# Altium PCB power_board_v0.PcbDoc
Units mm, origin at the board's own origin, x right, y up, seen from the top; angles counter-clockwise.
Board outline 50 x 50 mm, 4 copper layers (TOP, GND, PWR, BOTTOM), stack 0.603 mm thick; 71 components, 23 nets, 157 pads, 267 vias.
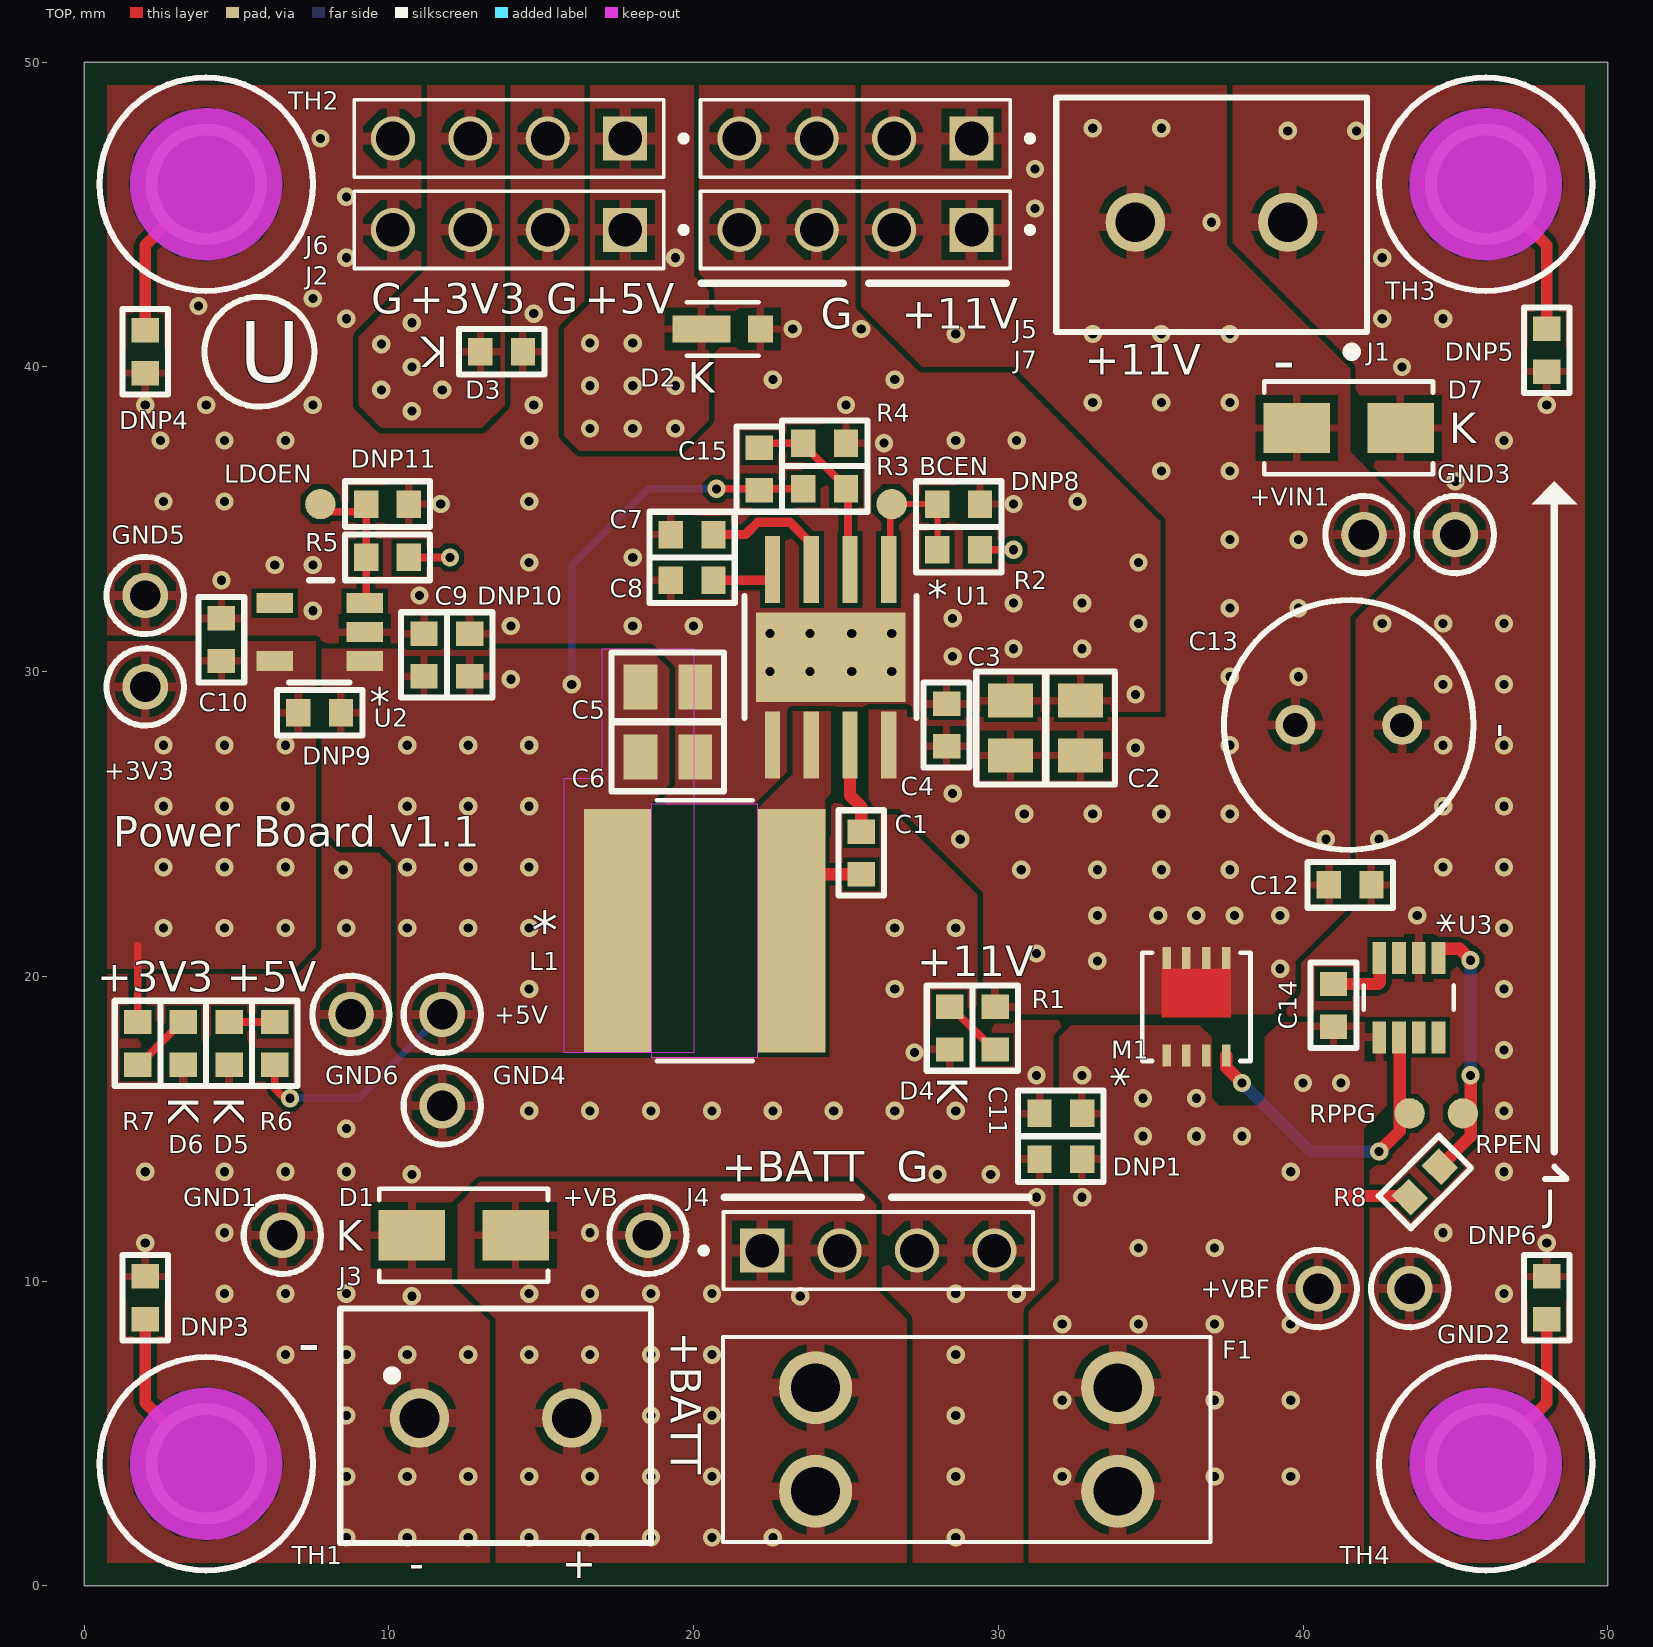
[diagram p0: TOP view]
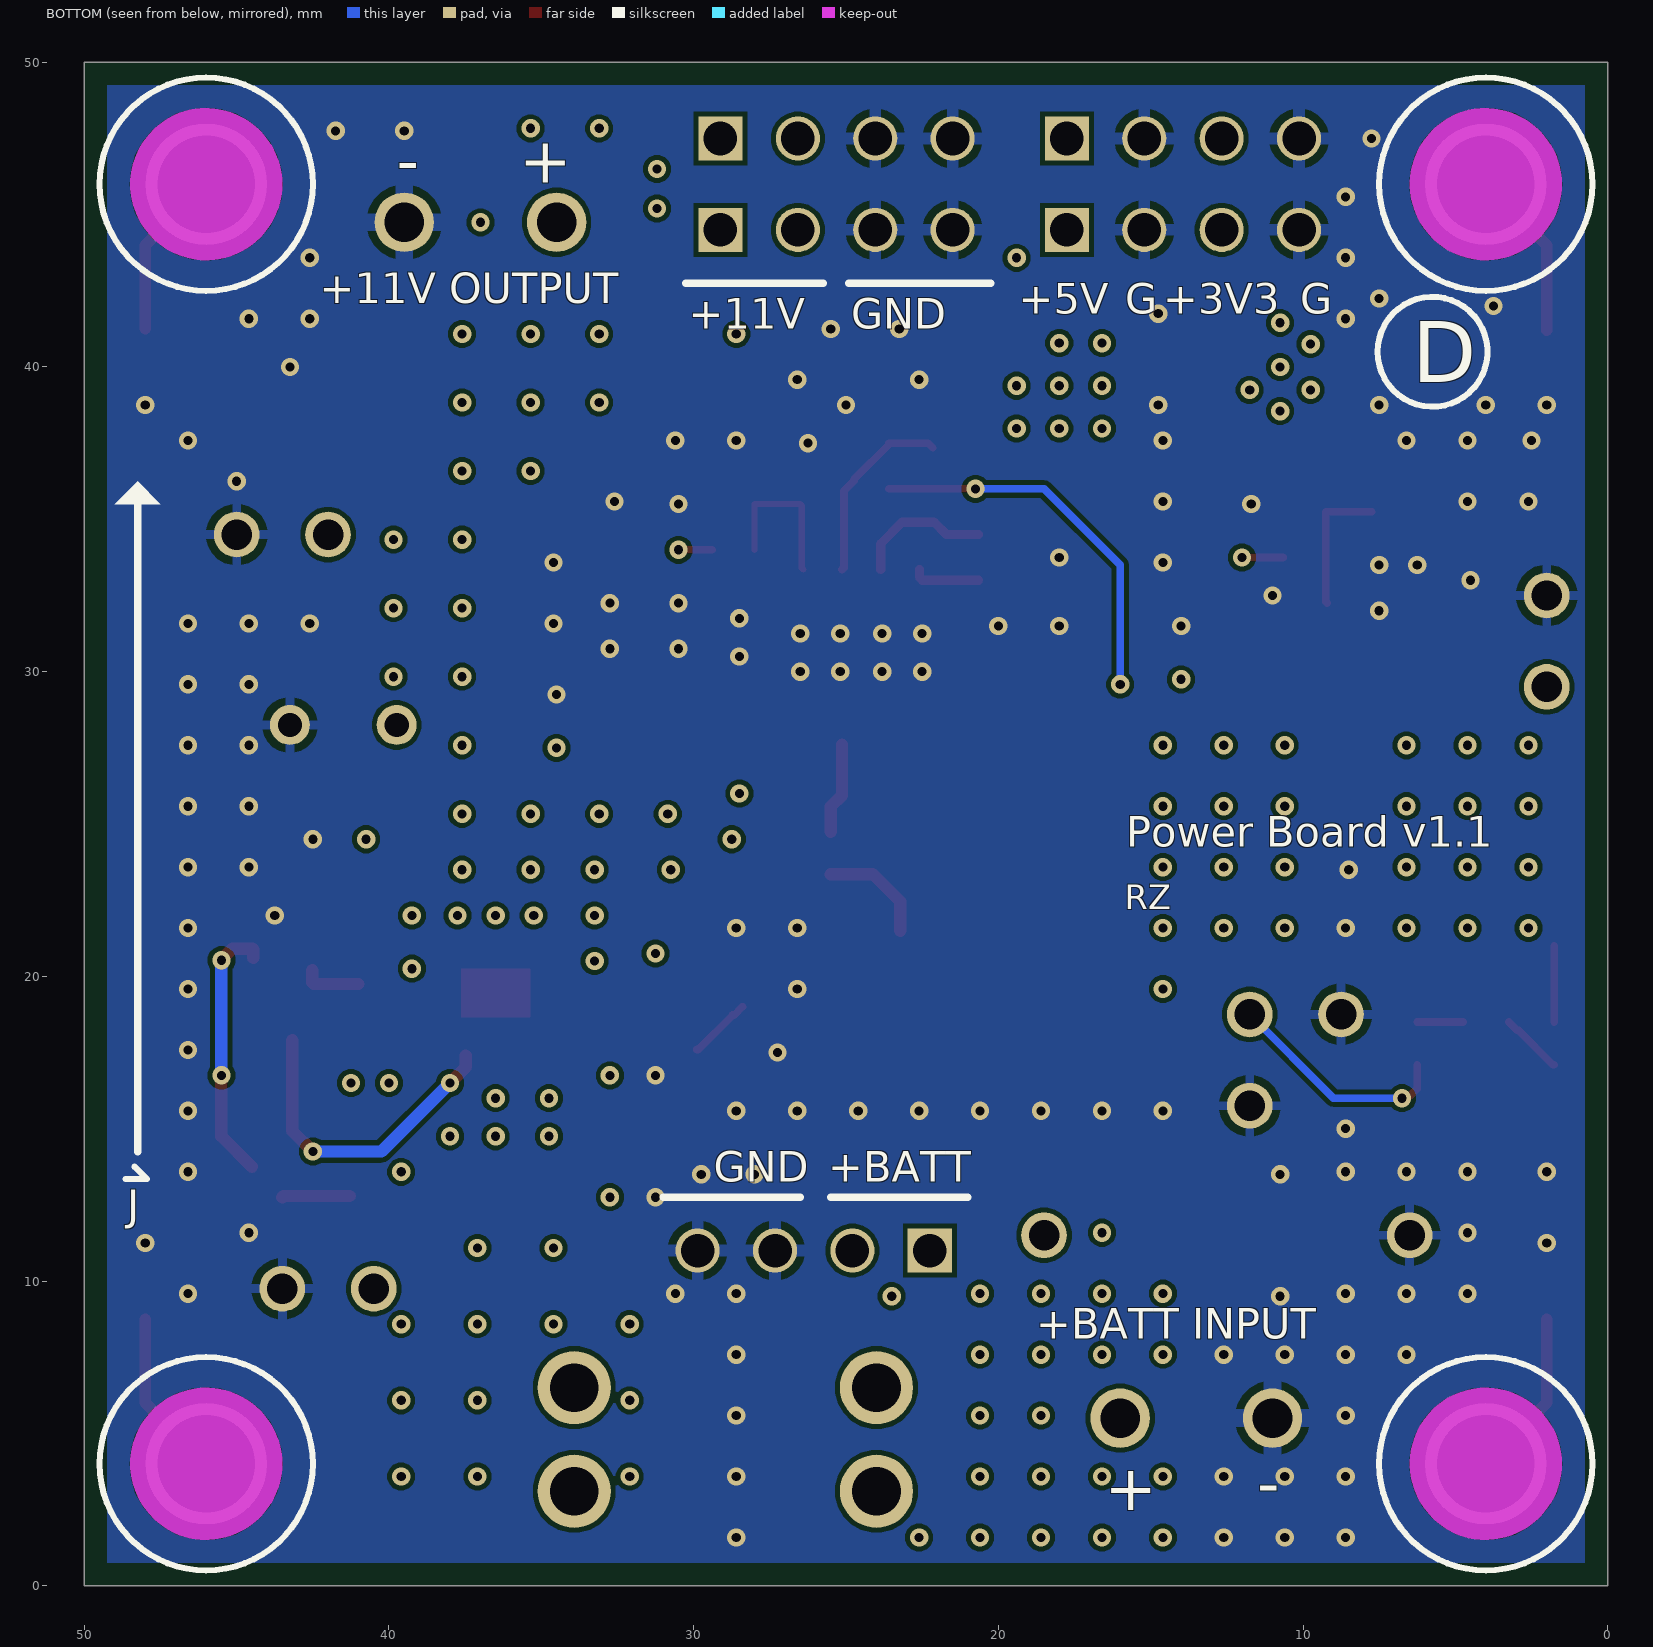
[diagram p1: BOTTOM view, seen from below]
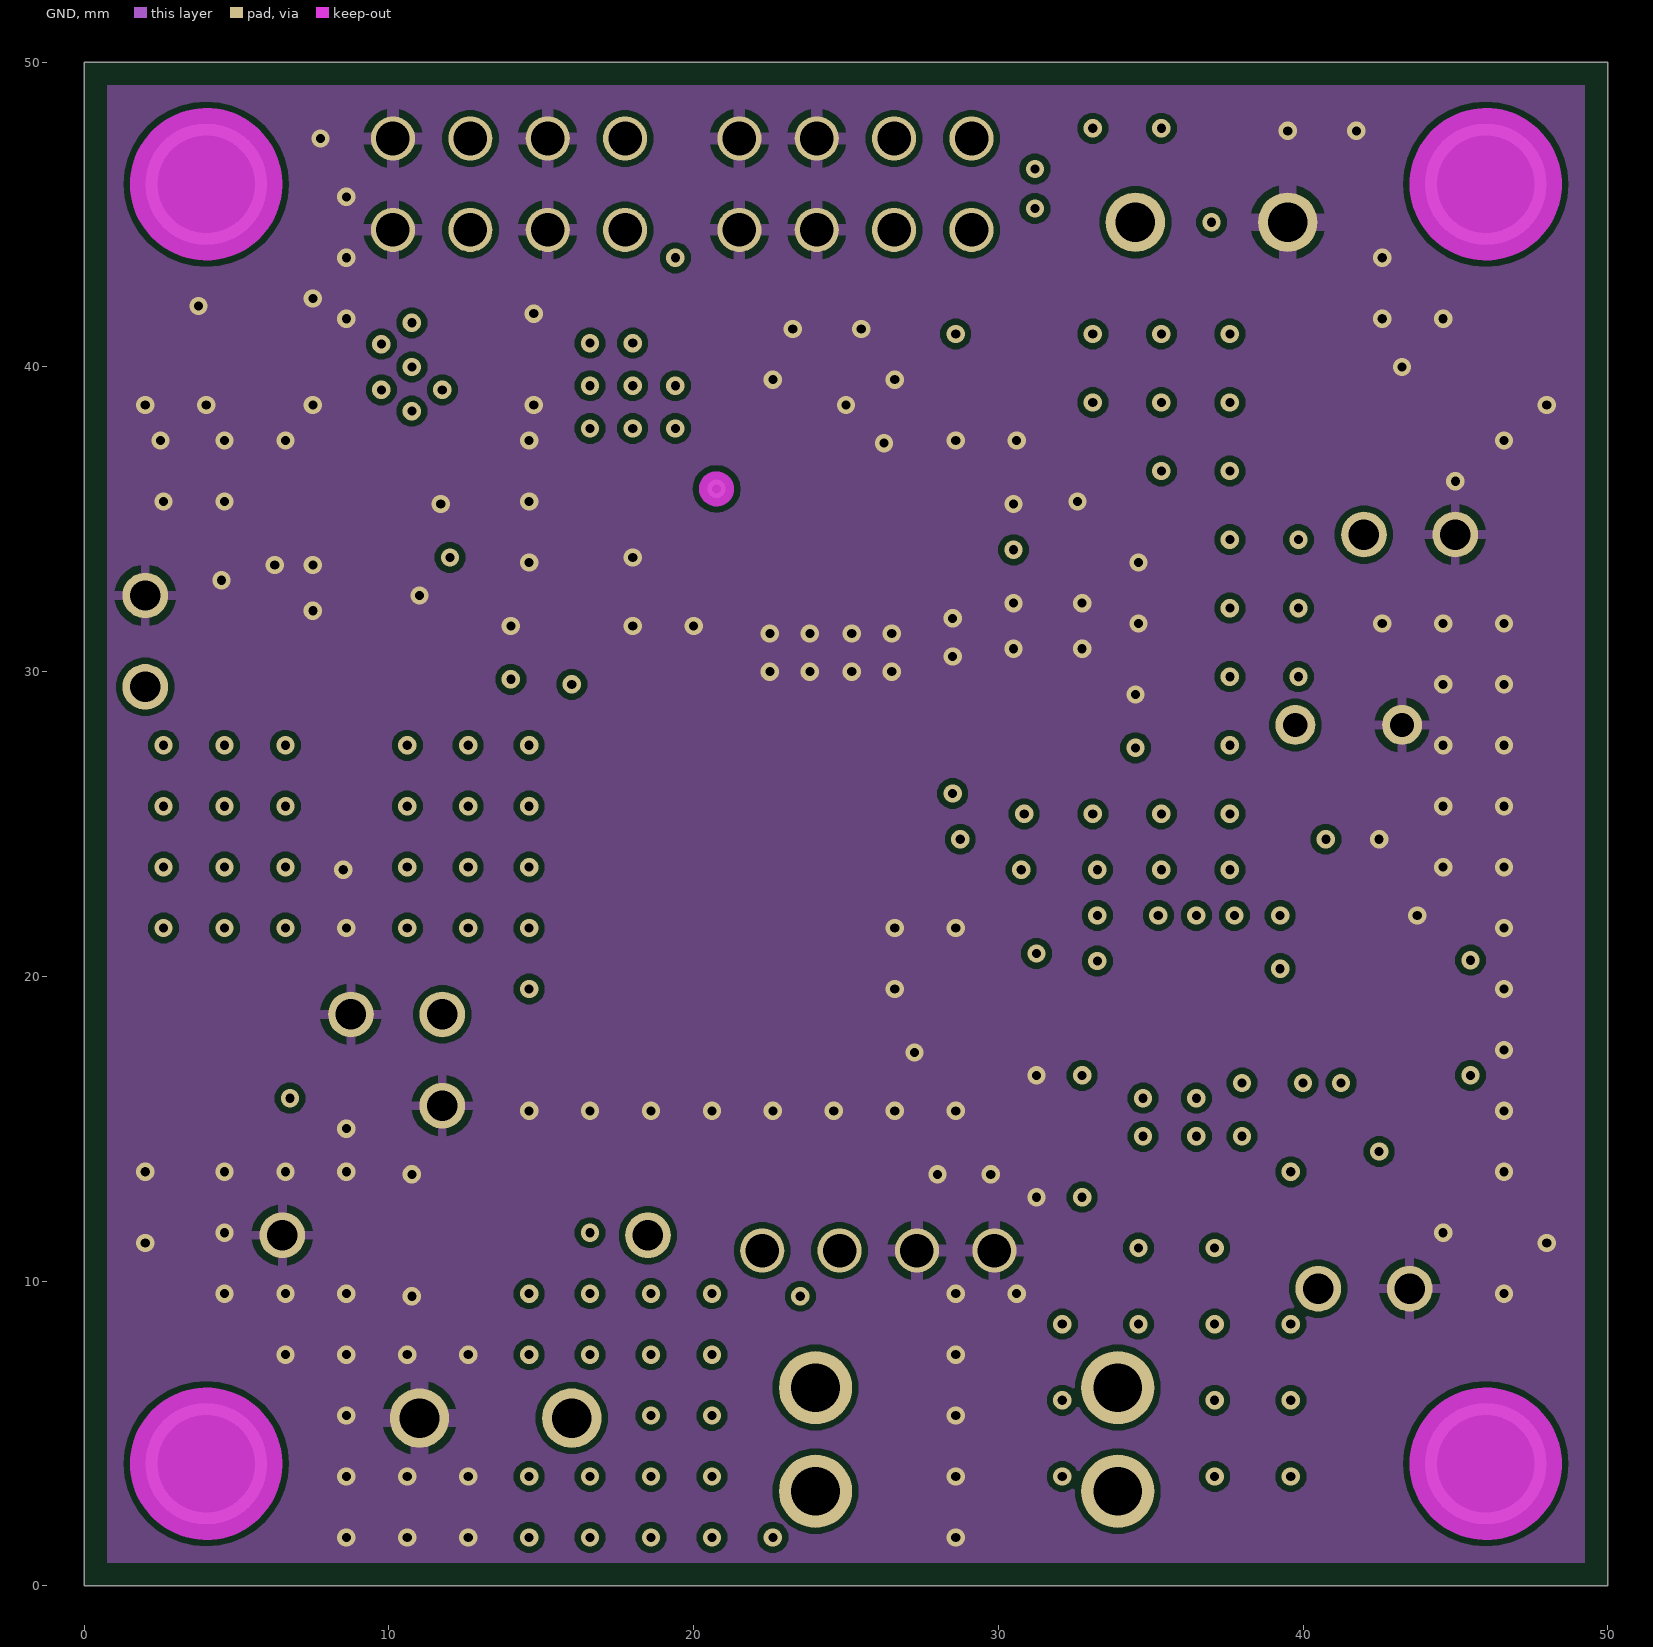
[diagram p2: GND]
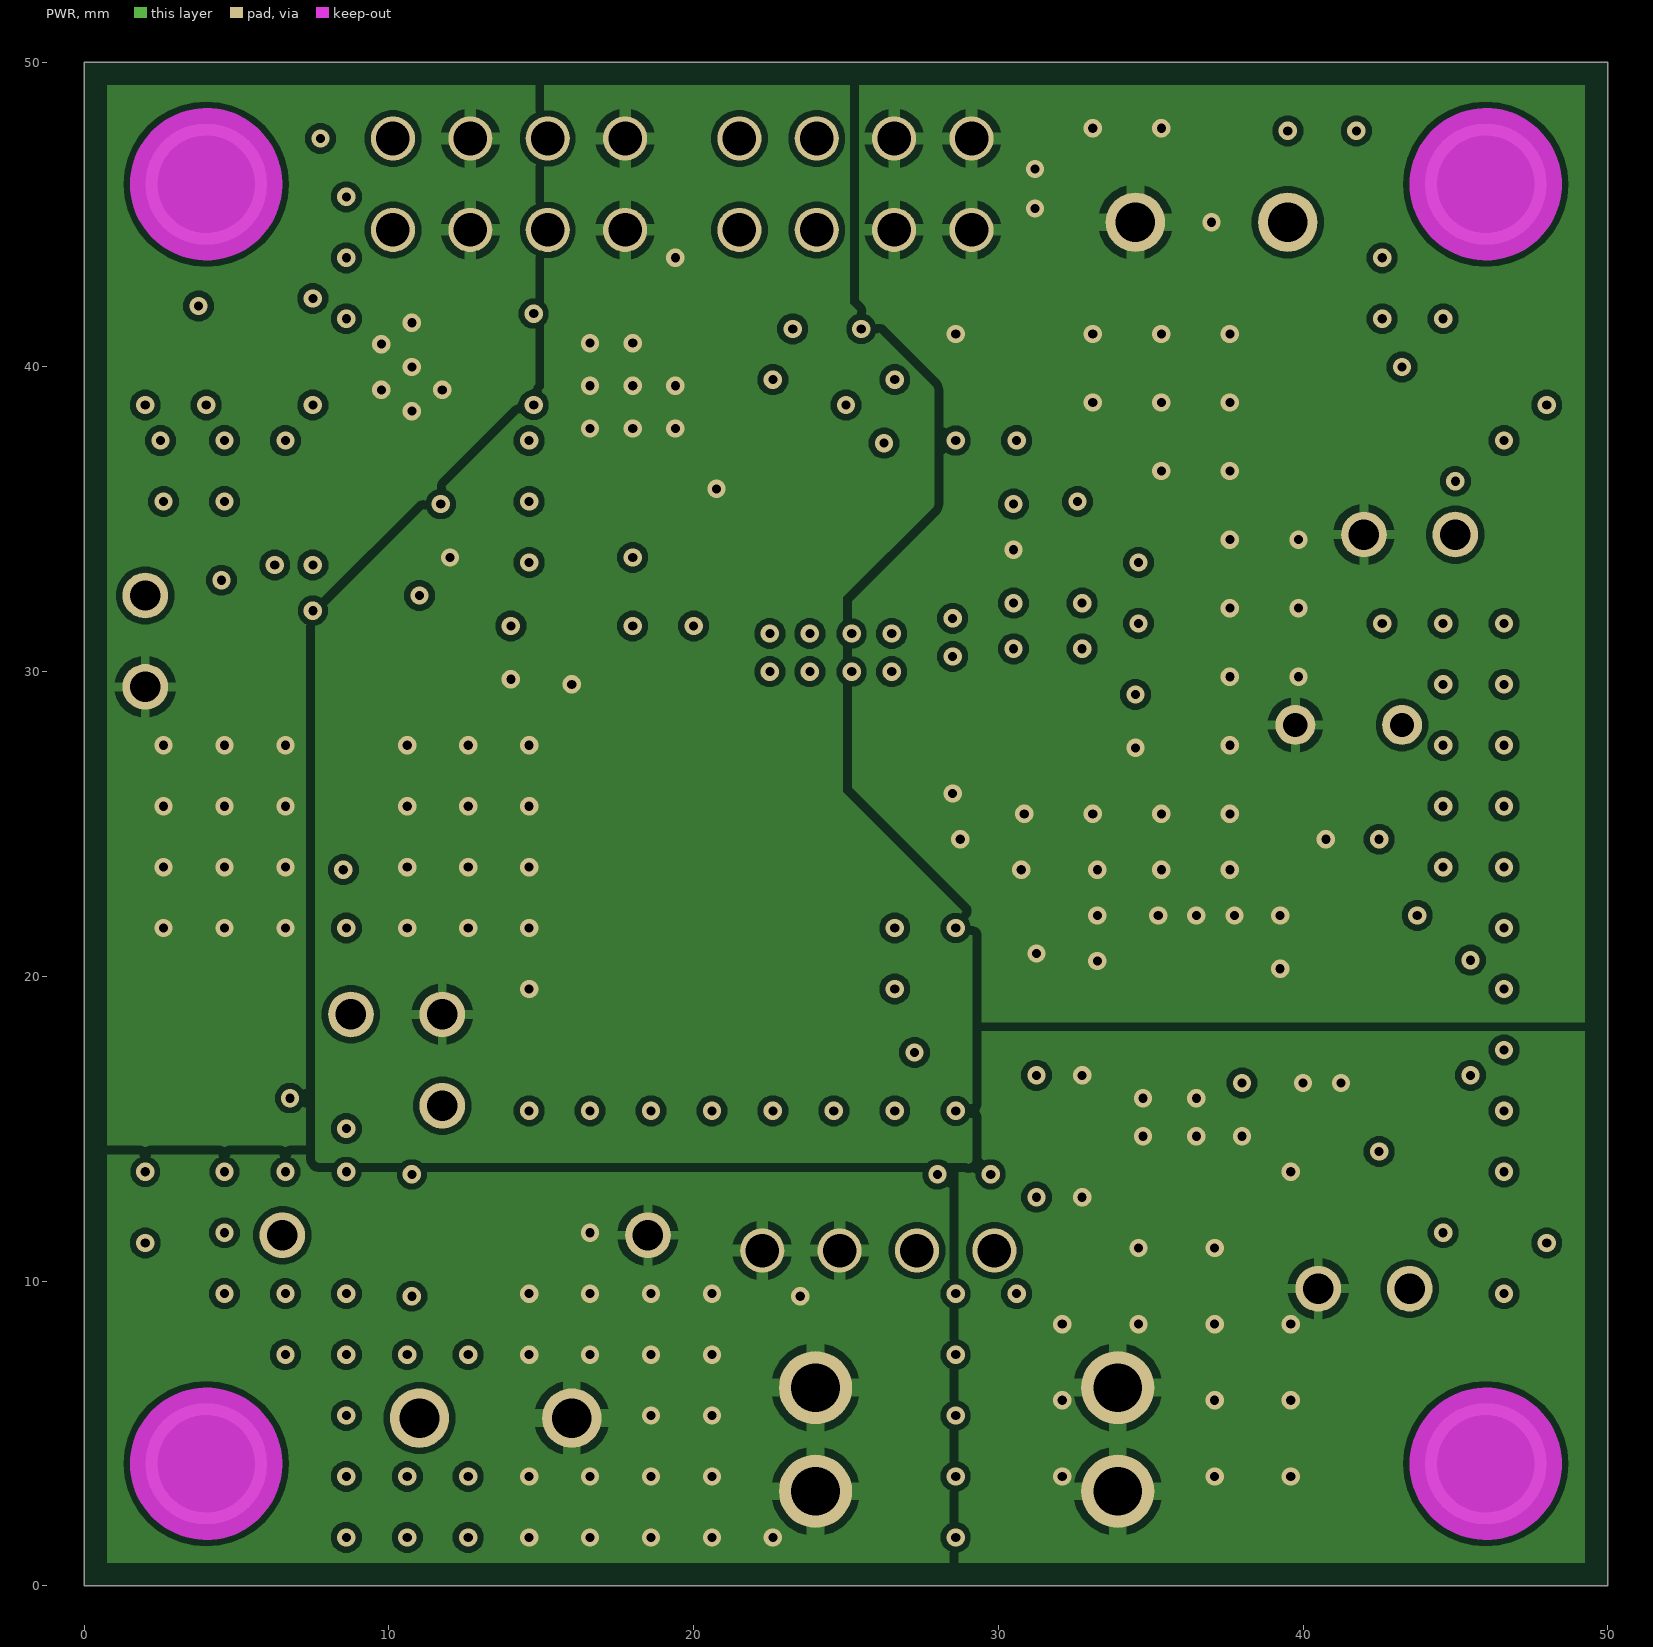
[diagram p3: PWR]
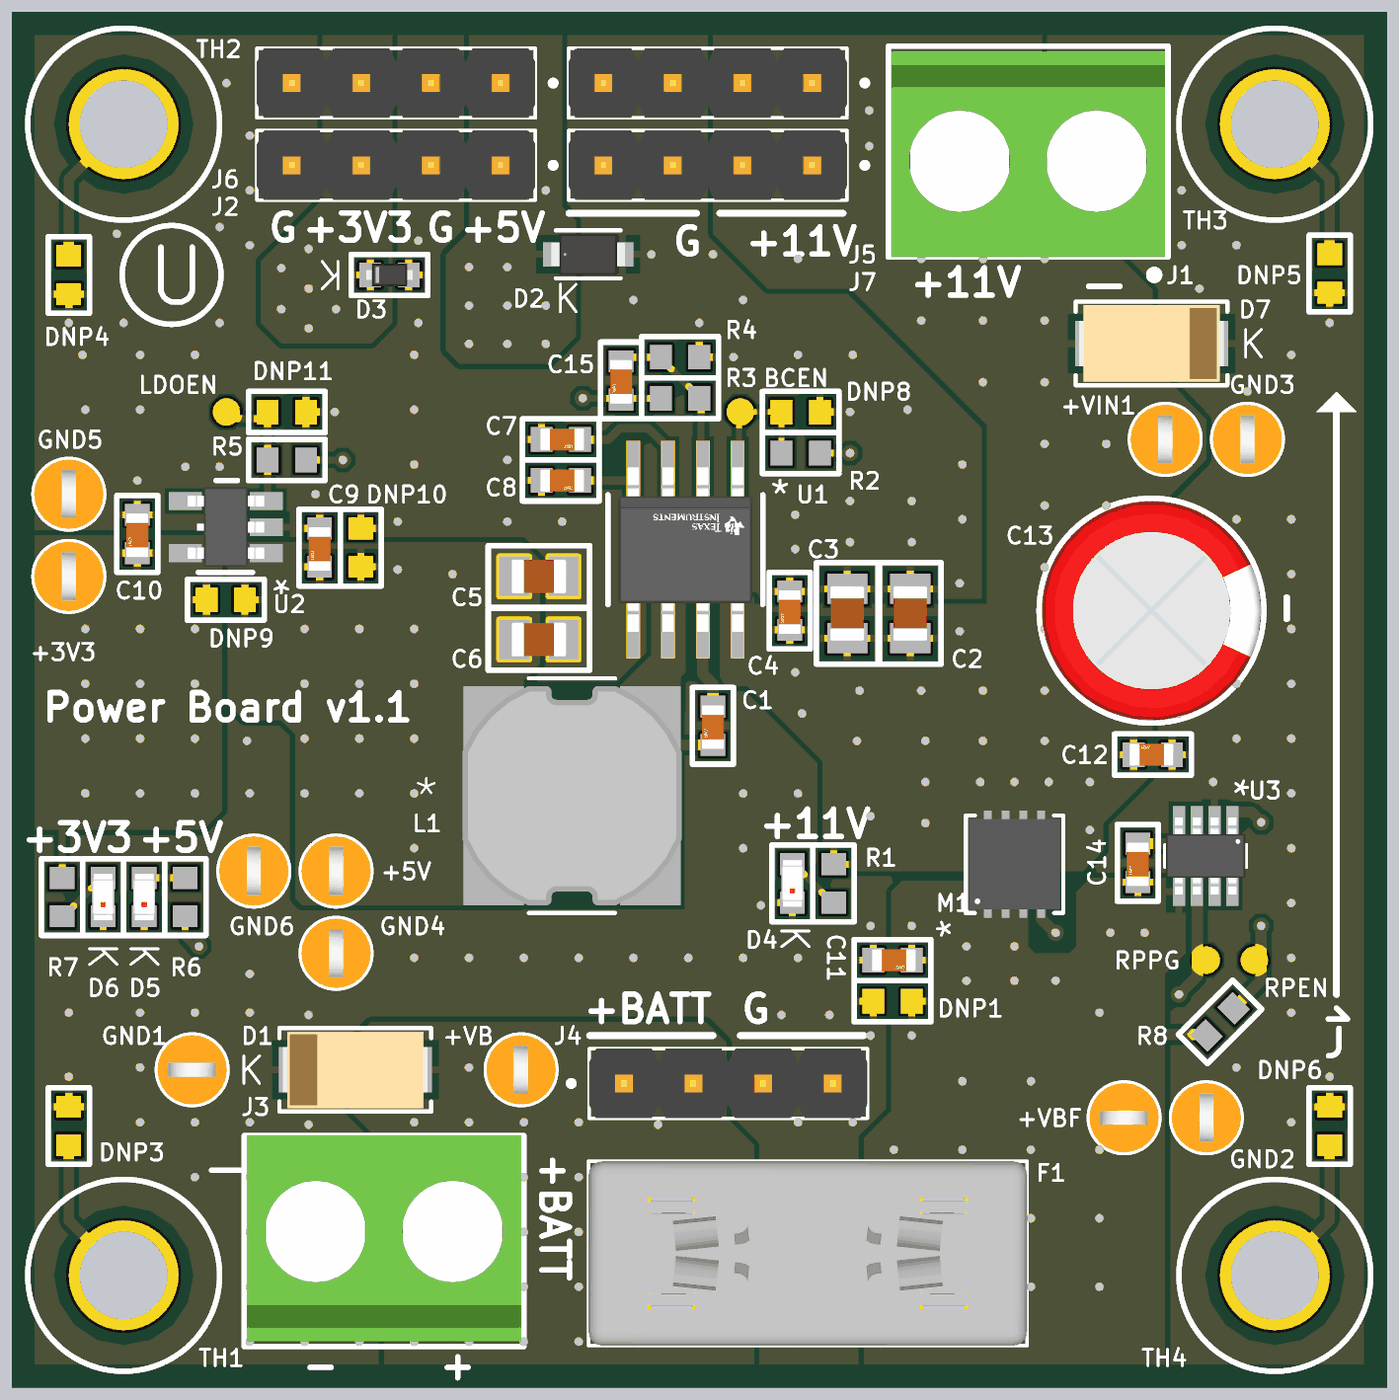
[diagram p4: 3D render of the assembled board from above, using the file's embedded part models]

## Layer stack, top to bottom
Top Solder: solder mask 0.0102, Solder Resist, Dk 3.5
TOP: signal copper 0.0356
Dielectric 2: prepreg 0.0711, PP-006, Dk 4.1
GND: signal copper 0.035
Dielectric 1: dielectric 0.32, FR-4, Dk 4.8
PWR: signal copper 0.035
Dielectric 3: prepreg 0.0711, PP-006, Dk 4.1
BOTTOM: signal copper 0.0356
Bottom Solder: solder mask 0.0102, Solder Resist, Dk 3.5

## Board outline
0,0 50,0 50,50 0,50

## Design rules (kind name [scope] priority, off if disabled: settings)
AcuteAngle [All] p1: minimum=6.00000000000000E+0001 checktracksonly=TRUE
BoardOutlineClearance "Clearance JLCPCB Board Outline" [All] p1: gap=0.3 ignorepadtopadclearanceinfootprint=FALSE except(0.2: Text-OutlineEdge; 0.743: Poly-OutlineEdge)
Clearance "Power Plane Clearance" [OnLayer('GND') OR OnLayer('PWR')] p1: gap=0.2 ignorepadtopadclearanceinfootprint=FALSE except(0.3: Fill-Fill Fill-Poly Fill-Region Poly-Poly Poly-Region Region-Region)
Clearance "keepout clearance" [IsKeepOut] p2: gap=0 ignorepadtopadclearanceinfootprint=TRUE
Clearance Clearance_1 [All] p3: gap=0.152 ignorepadtopadclearanceinfootprint=TRUE except(0.175: Fill-Fill Fill-Poly Fill-Region Poly-Poly Poly-Region Region-Region)
Clearance "Via Stitching Default Constraint" [IsStitchingVia vs (IsVia And (Not IsStitchingVia)) Or IsPad] p4: gap=0.2 ignorepadtopadclearanceinfootprint=FALSE
ComponentClearance [All] p1: gap=0 collisioncheckmode=3 verticalgap=0.254 showdistances=FALSE
DiffPairsRouting [All] p1: maxlimit=0.254 minlimit=0.152 mostfreqgap=0.254 toplayer_maxgap=0.152 toplayer_prefgap=0.152 toplayer_minwidth=0.089 toplayer_maxwidth=0.381 toplayer_prefwidth=0.122 midlayer1_mingap=0.254 midlayer1_minwidth=0.381 midlayer1_maxwidth=0.381 midlayer1_prefwidth=0.381 midlayer2_mingap=0.254 midlayer2_minwidth=0.381 midlayer2_maxwidth=0.381 midlayer2_prefwidth=0.381 bottomlayer_maxgap=0.152 bottomlayer_prefgap=0.152 bottomlayer_minwidth=0.089 bottomlayer_maxwidth=0.381 bottomlayer_prefwidth=0.122 maxuncoupledlength=12.7
HoleSize [All] p1: absolutevalues=TRUE maxlimit=6.3 minlimit=0.025 maxpercent=80.000 minpercent=20.000
HoleToHoleClearance [All] p1: gap=0.3 allowstackedmicrovias=FALSE
MinimumAnnularRing [All] p1: minimumring=0.15
MinimumSolderMaskSliver [All] p1: minsoldermaskwidth=0.038
PlaneConnect [All] p1: planeconnectstyle=Direct reliefexpansion=0.508 reliefentries=4 reliefconductorwidth=0.254 reliefairgap=0.254
PolygonConnect "+BATT CON LARGE THERMAL" [InComponent('j1') OR InComponent('F1') OR InComponent('J3') vs InNet('+VIN') OR InNet('GND') OR InNet('+VBATT') OR InNet('+VBATT_F')] p1: thpad.connectstyle=Relief thpad.reliefconductorwidth=0.6 thpad.reliefentries=4 thpad.polygonreliefangle="90 Angle" thpad.airgapwidth=0.254 smdpad.connectstyle=Relief smdpad.reliefconductorwidth=0.254 smdpad.reliefentries=4 smdpad.polygonreliefangle="90 Angle" smdpad.airgapwidth=0.254 via.connectstyle=Relief via.reliefconductorwidth=0.254 via.reliefentries=4 via.polygonreliefangle="90 Angle" via.airgapwidth=0.254
PolygonConnect "+HEADER THERMALS" [InComponent('j2') OR InComponent('J4') OR InComponent('J5') OR InComponent('J6') OR InComponent('J7') vs InNet('+VIN') OR InNet('GND') OR InNet('+VBATT') OR InNet('+VBATT_F') OR  InNet('+3V3') OR InNet('+5V')] p2: thpad.connectstyle=Relief thpad.reliefconductorwidth=0.4 thpad.reliefentries=4 thpad.polygonreliefangle="90 Angle" thpad.airgapwidth=0.254 smdpad.connectstyle=Relief smdpad.reliefconductorwidth=0.254 smdpad.reliefentries=4 smdpad.polygonreliefangle="90 Angle" smdpad.airgapwidth=0.254 via.connectstyle=Relief via.reliefconductorwidth=0.254 via.reliefentries=4 via.polygonreliefangle="90 Angle" via.airgapwidth=0.254
PolygonConnect "No Thermal Relief +5V" [InComponent('L1') OR InComponent('C5') OR InComponent('C6') OR InComponent('U2') vs InNet('+5V')] p3: thpad.connectstyle=Relief thpad.reliefconductorwidth=0.254 thpad.reliefentries=4 thpad.polygonreliefangle="90 Angle" thpad.airgapwidth=0.254 smdpad.connectstyle=Direct smdpad.reliefconductorwidth=0.254 smdpad.reliefentries=4 smdpad.polygonreliefangle="90 Angle" smdpad.airgapwidth=0.254 via.connectstyle=Direct via.reliefconductorwidth=0.254 via.reliefentries=4 via.polygonreliefangle="90 Angle" via.airgapwidth=0.254
PolygonConnect "No Thermal Relief GND" [InComponent('U1') OR InComponent('C5') OR InComponent('C6') vs InNet('GND')] p4: thpad.connectstyle=Relief thpad.reliefconductorwidth=0.254 thpad.reliefentries=4 thpad.polygonreliefangle="90 Angle" thpad.airgapwidth=0.254 smdpad.connectstyle=Direct smdpad.reliefconductorwidth=0.254 smdpad.reliefentries=4 smdpad.polygonreliefangle="90 Angle" smdpad.airgapwidth=0.254 via.connectstyle=Direct via.reliefconductorwidth=0.254 via.reliefentries=4 via.polygonreliefangle="90 Angle" via.airgapwidth=0.254
PolygonConnect "No Thermal Relief BATT GENERAL" [InComponent('M1') OR InComponent('U1') vs InNet('+VBATT_F') OR InNet('+VIN')] p5: thpad.connectstyle=Relief thpad.reliefconductorwidth=0.254 thpad.reliefentries=4 thpad.polygonreliefangle="90 Angle" thpad.airgapwidth=0.254 smdpad.connectstyle=Direct smdpad.reliefconductorwidth=0.254 smdpad.reliefentries=4 smdpad.polygonreliefangle="90 Angle" smdpad.airgapwidth=0.254 via.connectstyle=Direct via.reliefconductorwidth=0.254 via.reliefentries=4 via.polygonreliefangle="90 Angle" via.airgapwidth=0.254
PolygonConnect "No Thermal Relief +3V3" [InComponent('U2') vs InNet('+3V3')] p6: thpad.connectstyle=Relief thpad.reliefconductorwidth=0.254 thpad.reliefentries=4 thpad.polygonreliefangle="90 Angle" thpad.airgapwidth=0.254 smdpad.connectstyle=Direct smdpad.reliefconductorwidth=0.254 smdpad.reliefentries=4 smdpad.polygonreliefangle="90 Angle" smdpad.airgapwidth=0.254 via.connectstyle=Direct via.reliefconductorwidth=0.254 via.reliefentries=4 via.polygonreliefangle="90 Angle" via.airgapwidth=0.254
PolygonConnect "No Thermal Relief SW Node" [InComponent('L1') OR InComponent('U1') vs InNet('BC_SWN')] p7: thpad.connectstyle=Relief thpad.reliefconductorwidth=0.254 thpad.reliefentries=4 thpad.polygonreliefangle="90 Angle" thpad.airgapwidth=0.254 smdpad.connectstyle=Direct smdpad.reliefconductorwidth=0.254 smdpad.reliefentries=4 smdpad.polygonreliefangle="90 Angle" smdpad.airgapwidth=0.254 via.connectstyle=Direct via.reliefconductorwidth=0.254 via.reliefentries=4 via.polygonreliefangle="90 Angle" via.airgapwidth=0.254
PolygonConnect "GENERAL DEFAULT" [All] p8: thpad.connectstyle=Relief thpad.reliefconductorwidth=0.305 thpad.reliefentries=4 thpad.polygonreliefangle="90 Angle" thpad.airgapwidth=0.254 smdpad.connectstyle=Relief smdpad.reliefconductorwidth=0.254 smdpad.reliefentries=4 smdpad.polygonreliefangle="90 Angle" smdpad.airgapwidth=0.254 via.connectstyle=Direct via.reliefconductorwidth=0.254 via.reliefentries=4 via.polygonreliefangle="90 Angle" via.airgapwidth=0.254
RoomDefinition U_ldo_3v3 [InComponentClass('U_ldo_3v3')] p1: confinementstyle=ConfineIn formatcopy=TRUE lockcomponents=FALSE outline 16,38 0.5,38 0.5,26 16,26
RoomDefinition U_buck_converter [InComponentClass('U_buck_converter')] p2: confinementstyle=ConfineIn formatcopy=TRUE lockcomponents=FALSE outline 10.25,39.25 10.25,14.25 35.75,14.25 35.75,39.25
RoomDefinition U_reverse_polarity_protection [InComponentClass('U_reverse_polarity_protection')] p3: confinementstyle=ConfineIn formatcopy=TRUE lockcomponents=FALSE outline 49,10.25 49,33.25 29.75,33.25 29.75,10.25
RoutingVias [All] p1: holewidth=0.25 width=0.5 viastyle="Through Hole" minholewidth=0.2 minwidth=0.4 maxholewidth=0.4 maxwidth=1
SilkToSilkClearance [All] p1 off: silktosilkclearance=0
SilkToSolderMaskClearance [IsPad] p1: minsilkscreentomaskgap=0.15 clearancetoexposedcopper=TRUE
SolderMaskExpansion SolderMaskExpansion_PAD [InPadClass('All Pads')] p1: expansion=0.051 istentingtop=FALSE
SolderMaskExpansion SolderMaskExpansion_VIA [IsVia] p2: expansion=0.102 istentingtop=TRUE
SolderMaskExpansion [All] p3: expansion=0.102 istentingtop=FALSE
SupplyNets "Schematic Supply Nets_18" [InNet('+3V3')] p1: voltage=0.000
SupplyNets "Schematic Supply Nets_16" [InNet('+VBATT_F')] p2: voltage=0.000
SupplyNets "Schematic Supply Nets_15" [InNet('+VIN')] p3: voltage=0.000
SupplyNets "Schematic Supply Nets_7" [InNet('+VBATT')] p4: voltage=0.000
SupplyNets "Schematic Supply Nets_2" [InNet('+5V')] p5: voltage=0.000
SupplyNets "Schematic Supply Nets_8" [InNet('GND')] p6: voltage=0.000
Width [All] p1: maxlimit=5 minlimit=0.1 preferedwidth=0.254
22 further rules are at their usual default settings.

## Classes and differential pairs
component class U_ldo_3v3: C9 C10 DNP9 DNP10 DNP11 LDOEN R5 U2
component class U_buck_converter: BCEN C1 C2 C3 C4 C5 C6 C7 C8 C15 DNP8 L1 R2 R3 R4 U1
component class U_reverse_polarity_protection: C11 C12 C13 C14 DNP1 M1 R8 RPEN RPPG U3
component class top_level: +3V3 +5V +VB +VBF +VIN1 D1 D2 D3 D4 D5 D6 D7 DNP3 DNP4 DNP5 DNP6 F1 GND1 GND2 GND3 GND4 GND5 GND6 J1 J2 J3 J4 J5 J6 J7 R1 R6 R7 TH1 TH2 TH3 TH4

## Components (designator, comment, footprint, x,y, rotation, side; value= is the part's Value field where it differs from the comment)
+3V3 "TP - 5008 (Compact)" "5008 - Keystone Compact Footprint" 2,29.5 r90 top
+5V "TP - 5008 (Compact)" "5008 - Keystone Compact Footprint" 11.75,18.75 r270 top
+VB "TP - 5008 (Compact)" "5008 - Keystone Compact Footprint" 18.5,11.5 r90 top
+VBF "TP - 5008 (Compact)" "5008 - Keystone Compact Footprint" 40.5,9.75 r180 top
+VIN1 "TP - 5008 (Compact)" "5008 - Keystone Compact Footprint" 42,34.5 r90 top
BCEN "TP - SMD Pad Testpoint-Symbol-1" "TP - SMD Pad Testpoint" 26.5,35.5 r270 top
C1 "C - CAP CER 100nF 100V 10% 0603" CAP_0603 25.5,24 r270 top value=100nF
C2 "GRM21BR61E106KA73L" "CAP 0805" 32.675,28.175 r270 top value=10uF
C3 "GRM21BR61E106KA73L" "CAP 0805" 30.375,28.175 r270 top value=10uF
C4 "C - CAP CER 100nF 100V 10% 0603" CAP_0603 28.3,28.2 r270 top value=100nF
C5 "GRM21BR61E226ME44L" "CAP 0805" 19.175,29.525 r180 top value=22uF
C6 "GRM21BR61E226ME44L" "CAP 0805" 19.175,27.225 r180 top value=22uF
C7 "CAP CER 220nF 50V 10% 0603" CAP_0603 20,34.5 r0 top value=1uF
C8 "C - CAP CER 10nF 100V 10% 0603" CAP_0603 20,33 r0 top value=10nF
C9 "CAP CER 220nF 50V 10% 0603" CAP_0603 11.15,30.5 r270 top value=1uF
C10 "CAP CER 220nF 50V 10% 0603" CAP_0603 4.5,31 r270 top value=1uF
C11 "C - CAP CER 100nF 100V 10% 0603" CAP_0603 32.1,15.5 r0 top value=100nF
C12 "C - CAP CER 100nF 100V 10% 0603" CAP_0603 41.5,23 r180 top value=100nF
C13 "860020574012" "C - 860020574012" 41.5,28.25 r0 top value=220uF
C14 "C - CAP CER 100nF 100V 10% 0603" CAP_0603 41,19 r270 top value=100nF
C15 "CAP CER 220nF 50V 10% 0603" CAP_0603 22.15,36.6 r270 top value=10pF
D1 "D - SMAJ15CA" "D - SMAJ15CA" 12.452,11.5 r0 top
D2 "D - CUHZ5V6,H3F" "D - CUHZ5V6,H3F" 20.25,41.25 r0 top
D3 "D - ESD321DYAR" "D - ESD321DYAR" 13.7,40.5 r180 top
D4 "D - LTST-C193KRKT-5A" "LED 0603" 28.4,18.3 r270 top
D5 "D - LTST-C193KRKT-5A" "LED 0603" 4.75,17.8 r270 top
D6 "D - LTST-C193KRKT-5A" "LED 0603" 3.25,17.8 r270 top
D7 "D - SMAJ15CA" "D - SMAJ15CA" 41.5,38 r180 top
DNP1 "DNP - DNP PAD 0603" "DNP 0603" 32.05,14 r0 top
DNP3 "DNP - DNP PAD 0603" "DNP 0603" 2,9.45 r90 top
DNP4 "DNP - DNP PAD 0603" "DNP 0603" 2,40.5 r270 top
DNP5 "DNP - DNP PAD 0603" "DNP 0603" 48,40.55 r270 top
DNP6 "DNP - DNP PAD 0603" "DNP 0603" 48,9.45 r90 top
DNP8 "DNP - DNP PAD 0603" "DNP 0603" 28.7,35.5 r180 top
DNP9 "DNP - DNP PAD 0603" "DNP 0603" 7.725,28.65 r180 top
DNP10 "DNP - DNP PAD 0603" "DNP 0603" 12.65,30.55 r270 top
DNP11 "DNP - DNP PAD 0603" "DNP 0603" 9.95,35.5 r180 top
F1 "F -3568" "F - 3568" 28.96,4.8 r0 top
GND1 "TP - 5008 (Compact)" "5008 - Keystone Compact Footprint" 6.5,11.5 r0 top
GND2 "TP - 5008 (Compact)" "5008 - Keystone Compact Footprint" 43.5,9.75 r270 top
GND3 "TP - 5008 (Compact)" "5008 - Keystone Compact Footprint" 45,34.5 r90 top
GND4 "TP - 5008 (Compact)" "5008 - Keystone Compact Footprint" 11.75,15.75 r90 top
GND5 "TP - 5008 (Compact)" "5008 - Keystone Compact Footprint" 2,32.5 r270 top
GND6 "TP - 5008 (Compact)" "5008 - Keystone Compact Footprint" 8.75,18.75 r90 top
J1 "J - 691137710002" "J - 691137710002" 37,44.75 r180 top
J2 "Copy of SMTC-TSW-106-07-X-D_1" "J - 61300411121" 13.94,44.5 r180 top
J3 "J - 691137710002" "J - 691137710002" 13.5,5.5 r0 top
J4 "Copy of SMTC-TSW-106-07-X-D_1" "J - 61300411121" 26.06,11 r0 top
J5 "Copy of SMTC-TSW-106-07-X-D_1" "J - 61300411121" 25.31,47.5 r180 top
J6 "Copy of SMTC-TSW-106-07-X-D_1" "J - 61300411121" 13.94,47.5 r180 top
J7 "Copy of SMTC-TSW-106-07-X-D_1" "J - 61300411121" 25.31,44.5 r180 top
L1 "SRN8040-3R3Y" "L - SRN8040-3R3Y" 20.358,21.5 r0 top locked value=3.3uH
LDOEN "TP - SMD Pad Testpoint-Symbol-1" "TP - SMD Pad Testpoint" 7.75,35.5 r90 top
M1 "M - DMT6007LFG-7" "M - DMT6007LFG-7" 36.5,19 r90 top
R1 "ERJ-PB3B1001V" "RES 0603" 29.9,18.3 r90 top value=1k
R2 "R - RES 10kR 0.1W 1% 0603" "RES 0603" 28.7,34 r0 top value=10k
R3 "RC0603FR-07121KL" "RES 0603" 24.3,36 r180 top value=121k
R4 "ERJ-3EKF2212V" "RES 0603" 24.3,37.5 r180 top value=22.1k
R5 "R - RES 10kR 0.1W 1% 0603" "RES 0603" 9.95,33.75 r0 top value=10k
R6 "R - RES 220R 0.33W 1% 0603" "RES 0603" 6.25,17.8 r270 top value=220
R7 "R - RES 100R 0.33W 5% 0603" "RES 0603" 1.75,17.8 r270 top value=100
R8 "R - RES 0R 0.1W N/A% 0603" "RES 0603" 44,13.25 r45 top value=0
RPEN "TP - SMD Pad Testpoint-Symbol-1" "TP - SMD Pad Testpoint" 45.25,15.5 r90 top
RPPG "TP - SMD Pad Testpoint-Symbol-1" "TP - SMD Pad Testpoint" 43.5,15.5 r90 top
TH1 "TH - M3 Mounting Hole" "M3 Mounting" 4,4 r0 top locked
TH2 "TH - M3 Mounting Hole" "M3 Mounting" 4,46 r0 top locked
TH3 "TH - M3 Mounting Hole" "M3 Mounting" 46,46 r0 top locked
TH4 "TH - M3 Mounting Hole" "M3 Mounting" 46,4 r0 top locked
U1 "U - TPS54327DDAR" "U - TPS54327DDAR MFG" 24.495,30.475 r270 top locked
U2 "TLV75733PDBVR" "U - TLV75733PDBVR" 7.725,31.3 r180 top locked
U3 "U - LM74500QDDFRQ1" "U - LM74500QDDFRQ1" 43.475,19.3 r270 top

## Footprints (in the part's own frame and the unit in brackets; to place one, negate y for a bottom-side part, rotate by r counter-clockwise, add the part's x,y. Pads: shape width x height; smd on the part's side, far side on the other; paste and mask are expansions set on the pad)
"5008 - Keystone Compact Footprint" [mm]
  round 1.5 hole 1: 1(0,0)
  silkscreen extent -1.27,-1.27 1.27,1.27, body extent -1.27,-1.27 1.27,1.27, height 4.57
"C - 860020574012" [mm] "860020574012"
  round 1.308 hole 0.8: 1(-1.75,0) 2(1.75,0)
  silkscreen extent -4.1,-4.1 4.1,4.1, body extent -3.99,-3.98 3.99,4, height 11.39
"CAP 0805" [mm]
  rect 1.11x1.47 smd: 1(-0.875,0.025) 2(0.925,0.025)
  silkscreen extent -1.83,-1.1 1.88,1.15, body extent -0.97,-0.6 1.03,0.65, height 1.45
CAP_0603 [mm]
  rect 0.8x0.9 smd: 1(-0.75,0) 2(0.65,0)
  silkscreen extent -1.45,-0.75 1.35,0.75, body extent -1.48,-0.73 1.48,0.73, height 0.25
"D - CUHZ5V6,H3F" [mil]
  rect 75x35 smd paste+0 mask+0: 1(0,0)
  rect 32x35 smd paste+0 mask+0: 2(76.5,0)
  silkscreen extent -19,-34 74,34, body extent -25,-29 80,29, height 27
"D - ESD321DYAR" [mm] "ESD321DYAR"
  rect 0.8x0.9 smd: 1(-0.7,0) 2(0.7,0)
  silkscreen extent -1.4,-0.75 1.4,0.75, body extent -0.85,-0.42 0.85,0.42, height 0.69
"D - SMAJ15CA" [mil] "SMAJ15CA"
  rect 86x65 smd paste+0 mask+0: 1(-67,0) 2(67,0)
  silkscreen extent -109,-60 109,60, body extent -104,-55 104,55, height 92
"DNP 0603" [mm]
  rect 0.8x0.9 smd paste-2539.97: 1(-0.7,0) 2(0.7,0)
  silkscreen extent -1.4,-0.75 1.4,0.75
"F - 3568" [mm] "3568 - Fuse Holder 30 A 500V 1 Circuit Blade Through Hole"
  round 2.4 hole 1.6: 1(-4.96,1.7) 2(4.96,1.7) 3(-4.96,-1.7) 4(4.96,-1.7)
  silkscreen extent -8,-3.36 8,3.36, body extent -8,-3.37 8,3.36, height 7.38
"J - 61300411121" [mm]
  rect 1.45x1.45 / inner round 1.45 / far side rect 1.45x1.45 hole 1.1: 1(-3.81,0)
  round 1.45 hole 1.1: 2(-1.27,0) 3(1.27,0) 4(3.81,0)
  silkscreen extent -5.83,-1.27 5.08,1.27, body extent -5.08,-1.27 5.08,1.27, height 7.27
"J - 691137710002" [mm]
  round 1.95 hole 1.3: 1(-2.5,0) 2(2.5,0)
  silkscreen extent -5.1,-4.1 5.1,4.35, body extent -5,-3.9 5,3.6, height 11.5
"L - SRN8040-3R3Y" [mil] "SRN8040-3R3Y"
  rect 87x315 smd paste+0 mask+0: 1(-112.5,0) 2(112.5,0)
  silkscreen extent -62,-168 62,169, body extent -157,-157 157,157, height 158
"LED 0603" [mm]
  rect 0.8x0.9 smd: 1(-0.7,0) 2(0.7,0)
  silkscreen extent -1.4,-0.75 1.4,0.75, body extent -1.25,-0.55 1.25,0.55, height 0.25
"M3 Mounting" [mm]
  round 4 hole 3.2: 1(0,0)
  TOP keep-out circle w0.2: c0,0 r3.5
  silkscreen extent -3.5,-3.5 3.5,3.5
"M - DMT6007LFG-7" [mil]
  rect 28x11 smd paste+0 mask+0: 1(-63,38.39) 2(-63,12.8) 3(-63,-12.8) 4(-63,-38.39) 5(63,-38.39) 6(63,-12.8) 7(63,12.8) 8(63,38.39)
  TOP region: -13.7,44.5 49.3,44.5 49.3,-44.5 -13.7,-44.5
  silkscreen extent -70,-70 70,70, body extent -65,-65 65,65, height 36
"RES 0603" [mm]
  rect 0.8x0.9 smd: 1(-0.7,0) 2(0.7,0)
  silkscreen extent -1.4,-0.75 1.4,0.75, body extent -0.88,-0.48 0.87,0.47, height 1.3
"TP - SMD Pad Testpoint" [mm]
  round 1 smd paste-2539.97: 1(0,0)
"U - LM74500QDDFRQ1" [mm]
  rect 1.05x0.45 smd paste+0 mask+0: 1(-1.3,0.975) 2(-1.3,0.325) 3(-1.3,-0.325) 4(-1.3,-0.975) 5(1.3,-0.975) 6(1.3,-0.325) 7(1.3,0.325) 8(1.3,0.975)
  silkscreen extent -0.4,-1.48 0.4,1.47, body extent -1.4,-1.45 1.4,1.45, height 1.01
"U - TLV75733PDBVR" [mm]
  rect 1.2x0.65 smd paste+0 mask+0: 1(-1.475,0.95) 2(-1.475,0) 3(-1.475,-0.95) 4(1.475,-0.95) 5(1.475,0.95)
  silkscreen extent -0.97,-1.7 1,1.65, body extent -1.4,-1.45 1.4,1.45, height 1.2
"U - TPS54327DDAR MFG" [mm]
  rect 2.2x0.5 smd paste-1000 mask+0: 1(-2.875,1.905) 2(-2.875,0.635) 3(-2.875,-0.635) 4(-2.875,-1.905) 5(2.875,-1.905) 6(2.875,-0.635) 7(2.875,0.635) 8(2.875,1.905)
  rect 2.95x4.9 smd paste-1000 mask-1000: 9(0,0)
  silkscreen extent -2,-2.82 2,2.83, body extent -4.08,-2.68 4.08,2.68, height 0.25

## Part data
+3V3 +5V +VB +VBF +VIN1 GND1 GND2 GND3 GND4 GND5 GND6: "5008 - Orange PC Test Point, Compact Phosphor Bronze Silver Plating Through Hole Mounting Type"
BCEN LDOEN RPEN RPPG: "Testpoint used for debugging and testing. SMD Pad"
C1 C4 C11 C12 C14: "GRM188R72A104KA35D - 0.1 µF ±10% 100V Ceramic Capacitor X7R 0603 (1608 Metric)"
C2 C3: library part "C - CAP CER 10uF 25V 10% X5R 0805", "GRM21BR61E106KA73L - 10 µF ±10% 25V Ceramic Capacitor X5R 0805 (2012 Metric)"
C5 C6: library part "C - CAP CER 22uF 25V 20% 0805", "GRM21BR61E226ME44L - 22 µF ±20% 25V Ceramic Capacitor X5R 0805 (2012 Metric)"
C7 C9 C10: library part "C - CAP CER 1uF 25V 10% 0603", "GCJ188R71E105KA01D - 1 µF ±10% 25V Ceramic Capacitor X7R 0603 (1608 Metric)"
C8: "GCM188R72A103KA37D - 10000 pF ±10% 100V Ceramic Capacitor X7R 0603 (1608 Metric)"
C13: library part "C - CAP ELC 220uF 35V 20% CAN", "860020574012 - 220 µF 35 V Aluminum Electrolytic Capacitors Radial, Can 2000 Hrs @ 105°C"
C15: library part "C - CAP CER 10pF 100V 5% 0603", "GCM1885C2A100JA16J - 10 pF ±5% 100V Ceramic Capacitor C0G, NP0 0603 (1608 Metric)"
D1 D7: "SMAJ15CA - 24.4V Clamp 16.4A Ipp Tvs Diode Surface Mount DO-214AC (SMA)"
D2: "CUHZ5V6,H3F - TVS DIODE 5.6VWM 5.7VC US2H"
D3: "ESD321DYAR - 6.3V (Typ) Clamp 6A (8/20µs) Ipp Tvs Diode Surface Mount SOT-5X3"
D4 D5 D6: "LTST-C193KRKT-5A - Red 631nm LED Indication - Discrete 2V 0603 (1608 Metric)"
F1: "3568 - Fuse Holder 30 A 500V 1 Circuit Blade Through Hole"
J1 J3: "691137710002 - 2 Position Wire to Board Terminal Block Horizontal with Board 0.197\" (5.00mm) Through Hole"
J2 J4 J5 J6 J7: library part "J - 61300411121", "61300411121 - Connector Header Through Hole 4 position 0.100\" (2.54mm)"
L1: library part "L - IND 3.3uH 30% Nonstandard", "SRN8040-3R3Y - 3.3 µH Shielded Drum Core, Wirewound Inductor 5.6 A 21mOhm Max Nonstandard"
M1: "DMT6007LFG-7 - N-Channel 60 V 15A (Ta), 80A (Tc) 2.2W (Ta), 62.5W (Tc) Surface Mount POWERDI3333-8"
R1: library part "R - RES 1kR 0.2W 0.1% 0603", "ERJ-PB3B1001V - 1 kOhms ±0.1% 0.2W, 1/5W Chip Resistor 0603 (1608 Metric) Automotive AEC-Q200 Thick Film"
R2 R5: "ERA-3AEB103V - 10 kOhms ±0.1% 0.1W, 1/10W Chip Resistor 0603 (1608 Metric) Automotive AEC-Q200 Thin Film"
R3: library part "R - RES 122kR 0.1W 1% 0603", "RC0603FR-07121KL - 121 kOhms ±1% 0.1W, 1/10W Chip Resistor 0603 (1608 Metric) Moisture Resistant Thick Film"
R4: library part "R - RES 22.1kR 0.1W 1% 0603", "ERJ-3EKF2212V - 22.1 kOhms ±1% 0.1W, 1/10W Chip Resistor 0603 (1608 Metric) Automotive AEC-Q200 Thick Film"
R6: "ERJ-PA3F2200V - 220 Ohms ±1% 0.333W, 1/3W Chip Resistor 0603 (1608 Metric) Automotive AEC-Q200, Pulse Withstanding Thick Film"
R7: "ERJ-PA3J101V - 100 Ohms ±5% 0.333W, 1/3W Chip Resistor 0603 (1608 Metric) Automotive AEC-Q200, Pulse Withstanding Thick Film"
R8: "ERJ-3GEY0R00V - 0 Ohms Jumper Chip Resistor 0603 (1608 Metric) Automotive AEC-Q200 Thick Film"
U1: "TPS54327DDAR - 4.5V to 18V Input, 3-A Synchronous Step-Down Converter 8-SO PowerPAD -40 to 85", Ambient Temperature Range High=85°C, Case/Package=SOIC, Manufacturer="Texas Instruments", Manufacturer Lifecycle Status=ACTIVE, Manufacturer Part Number=TPS54327DDAR, Max Junction Temperature (Tj)=150°C, Max Output current=3A, Max Output Voltage=7V, Max Supply Voltage=18V, Min Input Voltage=4.5V, Min Operating Temperature=-40°C, Min Output Voltage=760mV, Quiescent Current=800µA, Switching Frequency=700kHz, Category="Voltage Regulators - Switching", ComponentLink1Description=https://sigma.octopart.com:443/104526336/technical_drawing/Texas-Instruments-TPS54327DDAR.pdf?src-supplier=Texas+Instruments, ComponentLink1URL=https://sigma.octopart.com:443/104526336/technical_drawing/Texas-Instruments-TPS54327DDAR.pdf?src-supplier=Texas+Instruments, ComponentLink2Description=https://octopart.com:443/opatz8j6/c1?t=__oNFOOaapSnVhz0JflxbbROEjMn8qx0VggcesLOsXVm1qBAI6HAgPyurjCw25N1bkmQFW9yPGBgGx0-OV6a1qCNd9haLjfDrSeyB36yHi6CHhDXm-X7AM3shTtTS0K4ufWLPGM9035tvF3WY9KNnW27Vhg7gZVrUz3zgjZoNzKmWPY3h9s6FdGiccB1hjyl0IMgFUWajN9-O9PJGonuZiqlYX9N7MFFrv_aEWgd4nLGzrjzb1ZMCAGS7na2gkf_w1DNitacGewcJ7_jjdbNMF49miKa1GomPL32h1pk-zJMmO4U7WZEuJMSZzz263ggCOI6NALWkgBSsXKod034_KSXhjmHQ1neP2H1Fy7hs0iEIe6iEpO48cB1RbMREqoeTuPL-udS&src-supplier=Texas+Instruments, ComponentLink2URL=https://octopart.com:443/opatz8j6/c1?t=__oNFOOaapSnVhz0JflxbbROEjMn8qx0VggcesLOsXVm1qBAI6HAgPyurjCw25N1bkmQFW9yPGBgGx0-OV6a1qCNd9haLjfDrSeyB36yHi6CHhDXm-X7AM3shTtTS0K4ufWLPGM9035tvF3WY9KNnW27Vhg7gZVrUz3zgjZoNzKmWPY3h9s6FdGiccB1hjyl0IMgFUWajN9-O9PJGonuZiqlYX9N7MFFrv_aEWgd4nLGzrjzb1ZMCAGS7na2gkf_w1DNitacGewcJ7_jjdbNMF49miKa1GomPL32h1pk-zJMmO4U7WZEuJMSZzz263ggCOI6NALWkgBSsXKod034_KSXhjmHQ1neP2H1Fy7hs0iEIe6iEpO48cB1RbMREqoeTuPL-udS&src-supplier=Texas+Instruments, ComponentLink3Description=https://datasheet.octopart.com:443/TPS54327DDAR-Texas-Instruments-datasheet-37740753.pdf?src-supplier=Texas+Instruments, ComponentLink3URL=https://datasheet.octopart.com:443/TPS54327DDAR-Texas-Instruments-datasheet-37740753.pdf?src-supplier=Texas+Instruments, ComponentLink4Description=https://datasheet.octopart.com:443/TPS54327DDAR-Texas-Instruments-datasheet-16054356.pdf?src-supplier=Texas+Instruments, ComponentLink4URL=https://datasheet.octopart.com:443/TPS54327DDAR-Texas-Instruments-datasheet-16054356.pdf?src-supplier=Texas+Instruments, ComponentLink5Description=https://datasheet.octopart.com:443/TPS54327DDAR-Texas-Instruments-datasheet-10669736.pdf?src-supplier=Texas+Instruments, ComponentLink5URL=https://datasheet.octopart.com:443/TPS54327DDAR-Texas-Instruments-datasheet-10669736.pdf?src-supplier=Texas+Instruments, ComponentLink6Description=https://sigma.octopart.com:443/49250132/technical_drawing/Texas-Instruments-TPS54327DDAR.pdf?src-supplier=Texas+Instruments, ComponentLink6URL=https://sigma.octopart.com:443/49250132/technical_drawing/Texas-Instruments-TPS54327DDAR.pdf?src-supplier=Texas+Instruments, ComponentLink7Description=https://datasheet.octopart.com:443/TPS54327DDAR-Texas-Instruments-datasheet-10254758.pdf?src-supplier=Texas+Instruments, ComponentLink7URL=https://datasheet.octopart.com:443/TPS54327DDAR-Texas-Instruments-datasheet-10254758.pdf?src-supplier=Texas+Instruments, ComponentLink8Description=https://datasheet.octopart.com:443/TPS54327DDAR-Texas-Instruments-datasheet-33022096.pdf?src-supplier=Upverter, ComponentLink8URL=https://datasheet.octopart.com:443/TPS54327DDAR-Texas-Instruments-datasheet-33022096.pdf?src-supplier=Upverter, ComponentLink9Description=https://datasheet.octopart.com:443/TPS54327DDAR-Texas-Instruments-datasheet-17023036.pdf?src-supplier=Newark, ComponentLink9URL=https://datasheet.octopart.com:443/TPS54327DDAR-Texas-Instruments-datasheet-17023036.pdf?src-supplier=Newark, ComponentLink10Description=https://datasheet.octopart.com:443/TPS54327DDAR-Texas-Instruments-datasheet-62089011.pdf?src-supplier=Newark, ComponentLink10URL=https://datasheet.octopart.com:443/TPS54327DDAR-Texas-Instruments-datasheet-62089011.pdf?src-supplier=Newark, ComponentLink11Description=https://datasheet.octopart.com:443/TPS54327DDAR-Texas-Instruments-datasheet-62336983.pdf?src-supplier=Newark, ComponentLink11URL=https://datasheet.octopart.com:443/TPS54327DDAR-Texas-Instruments-datasheet-62336983.pdf?src-supplier=Newark, ComponentLink12Description=https://datasheet.octopart.com:443/TPS54327DDAR-Texas-Instruments-datasheet-66617763.pdf?src-supplier=element14+APAC, ComponentLink12URL=https://datasheet.octopart.com:443/TPS54327DDAR-Texas-Instruments-datasheet-66617763.pdf?src-supplier=element14+APAC, ComponentLink13Description=https://datasheet.octopart.com:443/TPS54327DDAR-Texas-Instruments-datasheet-62292587.pdf?src-supplier=Farnell, ComponentLink13URL=https://datasheet.octopart.com:443/TPS54327DDAR-Texas-Instruments-datasheet-62292587.pdf?src-supplier=Farnell, ComponentLink14Description=https://datasheet.octopart.com:443/TPS54327DDAR-Texas-Instruments-datasheet-165804759.pdf?src-supplier=LCSC, ComponentLink14URL=https://datasheet.octopart.com:443/TPS54327DDAR-Texas-Instruments-datasheet-165804759.pdf?src-supplier=LCSC, ComponentLink15Description=https://datasheet.octopart.com:443/TPS54327DDAR-Texas-Instruments-datasheet-159590145.pdf?src-supplier=LCSC, ComponentLink15URL=https://datasheet.octopart.com:443/TPS54327DDAR-Texas-Instruments-datasheet-159590145.pdf?src-supplier=LCSC, ComponentLink16Description=https://datasheet.octopart.com:443/TPS54327DDAR-Texas-Instruments-datasheet-137316104.pdf?src-supplier=Future+Electronics, ComponentLink16URL=https://datasheet.octopart.com:443/TPS54327DDAR-Texas-Instruments-datasheet-137316104.pdf?src-supplier=Future+Electronics, ComponentLink17Description=https://datasheet.octopart.com:443/TPS54327DDAR-Texas-Instruments-datasheet-14168096.pdf?src-supplier=iiiC, ComponentLink17URL=https://datasheet.octopart.com:443/TPS54327DDAR-Texas-Instruments-datasheet-14168096.pdf?src-supplier=iiiC, ComponentLink18Description=http://sigma.octopart.com:80/reach_statement/Texas-Instruments-company-64.pdf?src-supplier=Compliance+Statements, ComponentLink18URL=http://sigma.octopart.com:80/reach_statement/Texas-Instruments-company-64.pdf?src-supplier=Compliance+Statements, ComponentLink19Description=http://sigma.octopart.com:80/conflict_mineral_statement/Texas-Instruments-company-63.pdf?src-supplier=Compliance+Statements, ComponentLink19URL=http://sigma.octopart.com:80/conflict_mineral_statement/Texas-Instruments-company-63.pdf?src-supplier=Compliance+Statements, Height=1.7mm, Lead Free="Lead Free", Length=4.89mm, Lifecycle Status=Production, Max Duty Cycle=65%, Max Operating Temperature=85°C, Min Supply Voltage=4.5V, Mounting Technology="Surface Mount", Number of Outputs=1, Operating Supply Voltage=18V, Output Current=3A, Output Type=Adjustable, Output Voltage=7V, Pins=8, Pricing="1=0.6794, 10=0.6274, 25=0.6062, 100=0.5869, 250=0.5746, 500=0.5667, 1000=0.5659 (USD)", Radiation Hardening=No, REACH SVHC=No, RoHS=Compliant, Schedule B="8542390000, 8542390000|8542390000|8542390000|8542390000|8542390000|8542390000|8542390000|8542390000|8542390000|8542390000|8542390000|8542390000|8542390000|8542390000|8542390000|8542390000|8542390000|8542390000|8542390000|8542390000|8542390000|8542390000|8542390000|85", Stock=1279, Supplier="Arrow Electronics", Supplier Part Number=TPS54327DDAR, Synchronous Rectifier=Yes, Thickness=1.48mm, Topology=Buck, Width=3.9mm
U2: library part "U - TLV75733PDBVR", "TLV75733PDBVR - 1-A, low-IQ high-accuracy low-dropout (LDO) voltage regulator with enable 5-SOT-23 -40 to 125", Manufacturer_Name="Texas Instruments", Copyright="Copyright (C) 2025 Ultra Librarian. All rights reserved.", Manufacturer_Part_Number=TLV75733PDBVR, RefDes=RefDes, Type=TYPE
U3: "LM74500QDDFRQ1 - Battery Battery Protection IC TSOT-23-8"

## Via types
v1: diameter 0.6, hole 0.3, TOP to BOTTOM, tented both sides, 267 vias

## Nets (pads, with @x,y where several pads share a name; then routed paths per layer and width w, separated by ;. In a path a pad name is that pad's centre, name@x,y a point inside that pad or via, vN(x,y) a via of type N, cw(c..) or ccw(c..) an arc to the next point about the centre after c; other vN are vias at no path point)
+3V3: +3V3.1 C10.2 D3.2 DNP9.2 J2.3 J6.3 R7.1 U2.5 | length 2.5
  TOP w0.254: R7.1 1.75,21
  other v1: 2.6,21.584 4.6,21.584 6.6,21.584 2.6,23.584 4.6,23.584 6.6,23.584 2.6,25.584 4.6,25.584 6.6,25.584 2.6,27.584 4.6,27.584 6.6,27.584 10.75,38.55 9.75,39.25 11.75,39.25 10.75,40 9.75,40.75 10.75,41.45
+5V: +5V.1 C5.2 C6.2 C9.2 C15.2 D2.1 DNP9.1 DNP10.2 J2.1 J6.1 L1.1 R3.2 R5.2 R6.2 U2.1 | length 21.5
  TOP w0.254: R6.2 6.25,16.319 6.503,16.066 6.684,16.066 v1(6.75,16) ; R5.2 v1(12,33.75) ; v1(20.75,36) R3.2
  BOTTOM w0.254: v1(6.75,16) 9,16 +5V.1 ; v1(16,29.584) 16,33.5 18.5,36 v1(20.75,36)
  other v1: 14.6,19.584 10.6,21.584 12.6,21.584 14.6,21.584 10.6,23.584 12.6,23.584 14.6,23.584 10.6,25.584 12.6,25.584 14.6,25.584 10.6,27.584 12.6,27.584 14.6,27.584 14,29.75 16.6,37.984 18,37.984 19.4,37.984 16.6,39.384 18,39.384 19.4,39.384 16.6,40.784 18,40.784 19.4,43.584
+VBATT: +VB.1 D1.2 F1.1 F1.3 J3.2 J4.1 J4.2
  other v1: 14.6,1.584 16.6,1.584 18.6,1.584 20.6,1.584 22.6,1.584 14.6,3.584 16.6,3.584 18.6,3.584 20.6,3.584 18.6,5.584 20.6,5.584 14.6,7.584 16.6,7.584 18.6,7.584 20.6,7.584 23.5,9.5 14.6,9.584 16.6,9.584 18.6,9.584 20.6,9.584 16.6,11.584
+VBATT_F: +VBF.1 C11.2 C14.2 DNP1.2 F1.2 F1.4 M1.1 M1.2 M1.3 R8.1 U3.5 | length 2.2
  TOP w0.406: 41.29,12.79 43.47,12.79 R8.1
  other v1: 32.1,3.584 37.1,3.584 39.6,3.584 32.1,6.084 37.1,6.084 39.6,6.084 32.1,8.584 34.6,8.584 37.1,8.584 39.6,8.584 34.6,11.084 37.1,11.084 32.75,12.75 39.6,13.584 34.75,14.75 36.5,14.75 38,14.75 34.75,16 36.5,16 40,16.5 41.25,16.5 32.75,16.75
+VIN: +VIN1.1 C2.2 C3.2 C4.2 C12.2 C13.1 D7.2 J1.2 J5.1 J5.2 J7.1 J7.2 M1.5 M1.6 M1.7 M1.8 R1.2 R2.2 U1.8 | length 1.1
  TOP w0.254: R2.2 v1(30.5,34)
  other v1: 39.25,20.25 33.25,20.5 31.25,20.75 33.25,22 35.25,22 36.5,22 37.75,22 39.25,22 30.75,23.5 33.25,23.5 35.35,23.5 37.6,23.5 28.75,24.5 40.75,24.5 30.85,25.334 33.1,25.334 35.35,25.334 37.6,25.334 28.5,26 34.5,27.5 37.6,27.584 37.6,29.834 39.85,29.834 37.6,32.084 39.85,32.084 37.6,34.334 39.85,34.334 35.35,36.584 37.6,36.584 33.1,38.834 35.35,38.834 37.6,38.834 28.6,41.084 33.1,41.084 35.35,41.084 37.6,41.084 37,44.75 31.2,45.2 31.2,46.5 33.1,47.834 35.35,47.834
BC_BST: C1.1 U1.7 | length 3
  TOP w0.406: U1.7 25.13,25.938 25.5,25.568 C1.1
BC_EN: BCEN.1 DNP8.2 R2.1 U1.1 | length 5.2
  TOP w0.203: U1.1 26.45,33.4 26.45,35.45 BCEN.1 DNP8.2 R2.1
BC_FB: C15.1 R3.1 R4.2 U1.2 | length 6.3
  TOP w0.254: C15.1 22.3,37.5 R4.2 23.6,37.45 24.727,36.323 24.727,36.273 25.065,35.935 25.065,33.415 U1.2
BC_SS: C8.2 U1.4 | length 2.2
  TOP w0.305: C8.2 22.493,33 22.59,33.097 U1.4
BC_SWN: C1.2 L1.2 U1.6 | length 3.6
  TOP w0.406: L1.2 23.215,22.448 24.117,23.35 C1.2
BC_VREG: C7.2 U1.3 | length 4.5
  TOP w0.305: C7.2 21.7,34.5 22.1,34.9 23.16,34.9 23.86,34.2 U1.3
GND: C2.1 C3.1 C4.1 C5.1 C6.1 C7.1 C8.1 C9.1 C10.1 C11.1 C12.1 C13.2 D1.1 D2.2 D3.1 D4.2 D5.2 D6.2 D7.1 DNP1.1 DNP3.2 DNP4.2 DNP5.2 DNP6.2 DNP8.1 DNP10.1 DNP11.1 GND1.1 GND2.1 GND3.1 GND4.1 GND5.1 GND6.1 J1.1 J2.2 J2.4 J3.1 J4.3 J4.4 J5.3 J5.4 J6.2 J6.4 J7.3 J7.4 R4.1 U1.5 U1.9 U2.2 U3.2
  other v1: 8.6,1.584 10.6,1.584 12.6,1.584 28.6,1.584 8.6,3.584 10.6,3.584 12.6,3.584 28.6,3.584 8.6,5.584 28.6,5.584 6.6,7.584 8.6,7.584 10.6,7.584 12.6,7.584 28.6,7.584 10.75,9.5 4.6,9.584 6.6,9.584 8.6,9.584 28.6,9.584 30.6,9.584 46.6,9.584 2,11.25 48,11.25 4.6,11.584 44.6,11.584 31.25,12.75 10.75,13.5 28,13.5 29.75,13.5 2,13.584 4.6,13.584 6.6,13.584 8.6,13.584 46.6,13.584 8.6,15 14.6,15.584 16.6,15.584 18.6,15.584 20.6,15.584 22.6,15.584 24.6,15.584 26.6,15.584 28.6,15.584 46.6,15.584 31.25,16.75 27.25,17.5 46.6,17.584 26.6,19.584 46.6,19.584 8.6,21.584 26.6,21.584 28.6,21.584 46.6,21.584 43.75,22 8.5,23.5 44.6,23.584 46.6,23.584 42.5,24.5 44.6,25.584 46.6,25.584 44.6,27.584 46.6,27.584 34.5,29.25 44.6,29.584 46.6,29.584 22.5,30 23.813,30 25.187,30 26.5,30 28.5,30.5 30.5,30.75 32.75,30.75 22.5,31.25 23.813,31.25 25.187,31.25 26.5,31.25 14,31.5 18,31.5 20,31.5 34.6,31.584 42.6,31.584 44.6,31.584 46.6,31.584 28.5,31.75 7.5,32 30.5,32.25 32.75,32.25 11,32.5 4.5,33 6.25,33.5 7.5,33.5 14.6,33.584 34.6,33.584 18,33.75 11.7,35.5 30.5,35.5 2.6,35.584 4.6,35.584 14.6,35.584 32.6,35.584 45,36.25 26.25,37.5 2.5,37.584 4.6,37.584 6.6,37.584 14.6,37.584 28.6,37.584 30.6,37.584 46.6,37.584 2,38.75 4,38.75 7.5,38.75 14.75,38.75 25,38.75 48,38.75 22.6,39.584 26.6,39.584 43.25,40 23.25,41.25 25.5,41.25 8.6,41.584 42.6,41.584 44.6,41.584 14.75,41.75 3.75,42 7.5,42.25 8.6,43.584 42.6,43.584 8.6,45.584 7.75,47.5 39.5,47.75 41.75,47.75
LDO_EN: DNP11.2 LDOEN.1 R5.1 U2.3 | length 4.5
  TOP w0.254: LDOEN.1@7.75,35.25 9.25,35.25 R5.1 9.25,32.3 U2.3
NetD4_1: D4.1 R1.1 | length 2.1
  TOP w0.254: D4.1 28.673,18.727 28.723,18.727 29.85,17.6 R1.1
NetD5_1: D5.1 R6.1 | length 1.5
  TOP w0.254: D5.1 R6.1
NetD6_1: D6.1 R7.2 | length 2.1
  TOP w0.254: R7.2 1.8,17.1 2.927,18.227 2.977,18.227 D6.1
NetDNP3_1: DNP3.1 TH1.1 | length 5.6
  TOP w0.381: DNP3.1 2,6 TH1.1
NetDNP4_1: DNP4.1 TH2.1 | length 5.6
  TOP w0.381: DNP4.1 2,44 TH2.1
NetDNP5_1: DNP5.1 TH3.1 | length 5.6
  TOP w0.381: TH3.1 48,44 DNP5.1
NetDNP6_1: DNP6.1 TH4.1 | length 5.6
  TOP w0.381: TH4.1 48,6 DNP6.1
RPP_EN: R8.2 RPEN.1 U3.1 | length 8.7
  TOP w0.406: U3.1 44.45,20.878 44.472,20.9 45.15,20.9 45.5,20.55 v1(45.5,20.529) ; R8.2 45.5,14.75 v1(45.5,16.75)
  BOTTOM w0.406: v1(45.5,16.75) v1(45.5,20.529)
RPP_G: M1.4 RPPG.1 U3.6 | length 10.5
  TOP w0.406: M1.4 37.475,17.025 v1(38,16.5) ; v1(42.5,14.25) 43.175,14.925 U3.6@43.175,17.9
  BOTTOM w0.406: v1(38,16.5) 40.25,14.25 v1(42.5,14.25)
RPP_VC: C14.1 U3.4 | length 1.9
  TOP w0.406: C14.1 42.466,19.75 42.525,19.809 U3.4@42.525,20.202
pads on no net: U2.4 U3.3 U3.7 U3.8

## Polygon pours and split planes (outlines as drawn)
GND on TOP "L1 MASTER GND" (solid, remove dead copper, pour order 11): 0.75,0.75 49.25,0.75 49.25,49.25 0.75,49.25
+3V3 on TOP "+3V3_L01_P009" (solid, pour order 9): 9,38.75 9.75,38 13.05,38 13.8,38.75 13.8,49.25 11.25,49.25 11.25,43.25 9,41
+VIN on TOP "+VIN_L01_P003" (solid, pour order 3): 43.5,35.224 41.55,37.224 41.55,39.95 38.75,42.75 37.5,44 37.5,49.25 25.5,49.25 25.5,42 27.5,40 30.5,40 35.5,35 35.5,28.5 27,28.5 27,28.75 25.75,28.75 25.75,25.75 26,25.5 26.75,25.5 29.5,22.75 29.5,18.75 39,18.75 39.75,19.5 39.75,20.5 41.55,22.3 41.55,26.3 41.55,31.8 43.5,33.75
+VBATT_F on TOP "+VBATT_F_L01_P002" (solid, pour order 2): 38.5,15.75 38.75,16 38.75,18 39.25,18.5 42.75,18.5 42.75,15.75 42,15 42,0.75 31,0.75 31,9 32,10 32,18 32.4,18.4 36.6,18.4 37,18 37,16 37.25,15.75
+5V on TOP "+5V_L01_P008" (solid, pour order 8): 15.75,37.75 16.25,37.25 19.5,37.25 20.5,38.25 20.5,42.5 20,43 20,49.25 16.6,49.25 16.6,42.1 15.75,41.25
+VBATT on TOP "+VBATT_L01_P004" (solid, pour order 4): 12.25,12.5 13,13.25 25.25,13.25 26,12.5 26,9.75 27,8.75 27,0.75 13.5,0.75 13.5,8.75 12.25,10
+3V3 on TOP "+3V3_L01_P006" (solid, pour order 6): 0.75,31 0.75,20.25 6.9,20.25 7.6,20.95 7.6,31
+5V on TOP "+5V_L01_P005" (solid, pour order 5): 10.5,17.5 10.25,17.75 10.25,23.75 9.75,24.25 8.4,24.25 7.8,24.85 7.8,30.75 18.55,30.75 19.2,30.1 19.2,26.3 18.605,25.705 18.605,17.5
BC_SWN on TOP "BC_SWN_L01_P007" (solid, pour order 7): 24.5,26 24.32,25.82 24.32,24.615 22.11,24.615 22.11,25.501 23.25,26.64 23.25,28.7 24.5,28.7
+3V3 on PWR "+3V3_L03_P022" (solid, pour order 22): 7.875,13.875 7.723,13.85 0,13.85 cw(c0,14) -0.15,14 -0.15,50 cw(c0,50) 0,50.15 15.25,50.15 cw(c15.25,50) 15.4,50 15.4,39.25 15.356,39.144 7.875,31.663
+5V on PWR "+5V_L03_P017" (solid, pour order 17): 7.723,13.875 cw(c7.725,14.025) 7.575,14.025 7.575,31.725 7.619,31.831 15.1,39.312 15.1,50 cw(c15.25,50) 15.25,50.15 25.125,50.15 25.125,42.088 27.856,39.356 27.9,39.25 27.9,35.5 27.856,35.394 24.9,32.438 24.9,26.062 29.106,21.856 29.15,21.75 29.15,14 cw(c29,14) 28.917,13.875
+VBATT on PWR "+VBATT_L03_P021" (solid, pour order 21): 0,-0.15 cw(c0,0) -0.15,0 -0.15,14 cw(c0,14) 0,14.15 28.5,14.15 28.5,-0.15
+VIN on PWR "+VIN_L03_P019" (solid, pour order 19): 24.75,26 24.75,32.5 27.75,35.5 27.75,39.25 25.25,41.75 25.25,50 50,50 50,18.5 29,18.5 29,21.75
+VBATT_F on PWR "+VBATT_F_L03_P020" (solid, pour order 20): 28.7,-0.15 50,-0.15 ccw(c50,0) 50.15,0 50.15,18.5 ccw(c50,18.5) 50,18.65 28.7,18.65
GND on BOTTOM "GND_L04_P013" (solid, pour order 13): 0.75,0.75 49.25,0.75 49.25,49.25 0.75,49.25
GND on GND "GND_L02_P023" (solid, pour order 23): 0.75,0.75 49.25,0.75 49.25,49.25 0.75,49.25

## Keep-outs
TOP:
  rectangle: 18.605,17.347 22.11,25.653
  region: 18.534,17.5 15.75,17.5 15.75,26.5 17,26.5 17,30.75 20,30.75 20,17.5
GND:
  circle w0.75: c20.75,36 r0.2
Keep-Out Layer:
  circle w3: c4,4 r1
  circle w3: c4,46 r1
  circle w3: c46,4 r1
  circle w3: c46,46 r1

## Silkscreen, mask and mechanical layers (free items; w line width, h text height)
Top Overlay:
  circle w0.2: c5.75,40.5 r1.803
  region: 48.25,36.25 47.5,35.5 49,35.5
  lines w0.2: 47.95,13.35 48.65,13.35 48.25,13.75
  lines w0.25: 20.25,42.75 24.9,42.75 ; 21,12.75 25.5,12.75 ; 25.75,42.75 30.25,42.75 ; 26.5,12.75 31,12.75 ; 48.25,14.25 48.25,35.5
  text "G" at 9.417,41.75 h1
  text "+3V3" at 10.667,41.75 h1
  text "G" at 15.167,41.75 h1
  text "+5V" at 16.417,41.75 h1
  text "G" at 24.167,41.25 h1
  text "+11V" at 26.834,41.25 h1
  text "+11V" at 32.834,39.75 h1
  text "U" at 5.084,39.5 h2
  text "-" at 39,39.5 h1.5
  text "*" at 27.667,32 h1
  text "Power Board v1.1" at 0.95,24.25 h1
  text "+11V" at 27.334,20 h1
  text "+3V3" at 0.417,19.5 h1
  text "+5V" at 4.667,19.5 h1
  text "+BATT" at 20.917,13.25 h1
  text "G" at 26.667,13.25 h1
  text "J" at 47.917,12 h1
  text "+BATT" at 19.25,8.333 h1 r270
  text "-" at 7,7.25 h1.5
  text "-" at 10.667,0.25 h1
  text "+" at 15.667,0.25 h1
Bottom Overlay:
  circle w0.2: c46,46 r3.5
  circle w0.2: c5.75,40.5 r1.803
  circle w0.2: c4,46 r3.5
  circle w0.2: c4,4 r3.5
  circle w0.2: c46,4 r3.5
  region: 48.25,36.25 47.5,35.5 49,35.5
  lines w0.2: 48.35,13.75 47.95,13.35 48.65,13.35
  lines w0.25: 20.25,42.75 24.9,42.75 ; 21,12.75 25.5,12.75 ; 25.75,42.75 30.25,42.75 ; 26.5,12.75 31,12.75 ; 48.25,14.25 48.25,30 48.25,35.5
  text "+" at 34,46.05 h1.5
  text "-" at 39,46.05 h1.5
  text "+11V OUTPUT" at 42.265,42.1 h1
  text "G" at 10.083,41.75 h1
  text "+3V3" at 14.583,41.75 h1
  text "G" at 15.833,41.75 h1
  text "+5V" at 19.333,41.75 h1
  text "GND" at 24.833,41.25 h1
  text "+11V" at 30.166,41.25 h1
  text "D" at 6.416,39.5 h2
  text "Power Board v1.1" at 15.8,24.25 h1
  text "RZ" at 15.85,22.2 h0.8
  text "+BATT" at 25.583,13.25 h1
  text "GND" at 29.333,13.25 h1
  text "J" at 48.583,12 h1
  text "+BATT INPUT" at 18.748,8.1 h1
  text "-" at 11.5,3.75 h1.5 r180
  text "+" at 16.5,3.75 h1.5 r180
Board shape:
  the board outline again, w0.2

## Text inside footprints (layer, text, board x,y; h text height)
C13: Top Overlay "-" at 46.828,27.822 h1 r90; Mechanical 13 "-" at 46.828,27.822 h1 r90
D1: Top Overlay "K" at 8.25,11 h1
D2: Top Overlay "K" at 19.798,39.15 h1; Mechanical 13 "*" at 19.831,40.615 h1.27
D3: Top Overlay "K" at 11.952,41 h1 r180
D4: Top Overlay "K" at 28,16.702 h1 r270
D5: Top Overlay "K" at 4.25,16.052 h1 r270
D6: Top Overlay "K" at 2.75,16.052 h1 r270
D7: Top Overlay "K" at 44.798,37.5 h1
L1: Top Overlay "*" at 14.684,20.865 h1.27; Mechanical 13 "*" at 16.395,20.23 h1.27
M1: Top Overlay "*" at 34.7,16.367 h1 r90
U2: Top Overlay "*" at 10.033,29.9 h1 r180
U3: Top Overlay "*" at 44,22.083 h1 r270